# Altium PCB LinReg5_3V3.PcbDoc
Units mil, origin at the board's own origin, x right, y up, seen from the top; angles counter-clockwise.
Board outline 1545 x 1480 mil, 2 copper layers (Top Layer, Bottom Layer); 16 components, 6 nets, 36 pads, 97 vias.
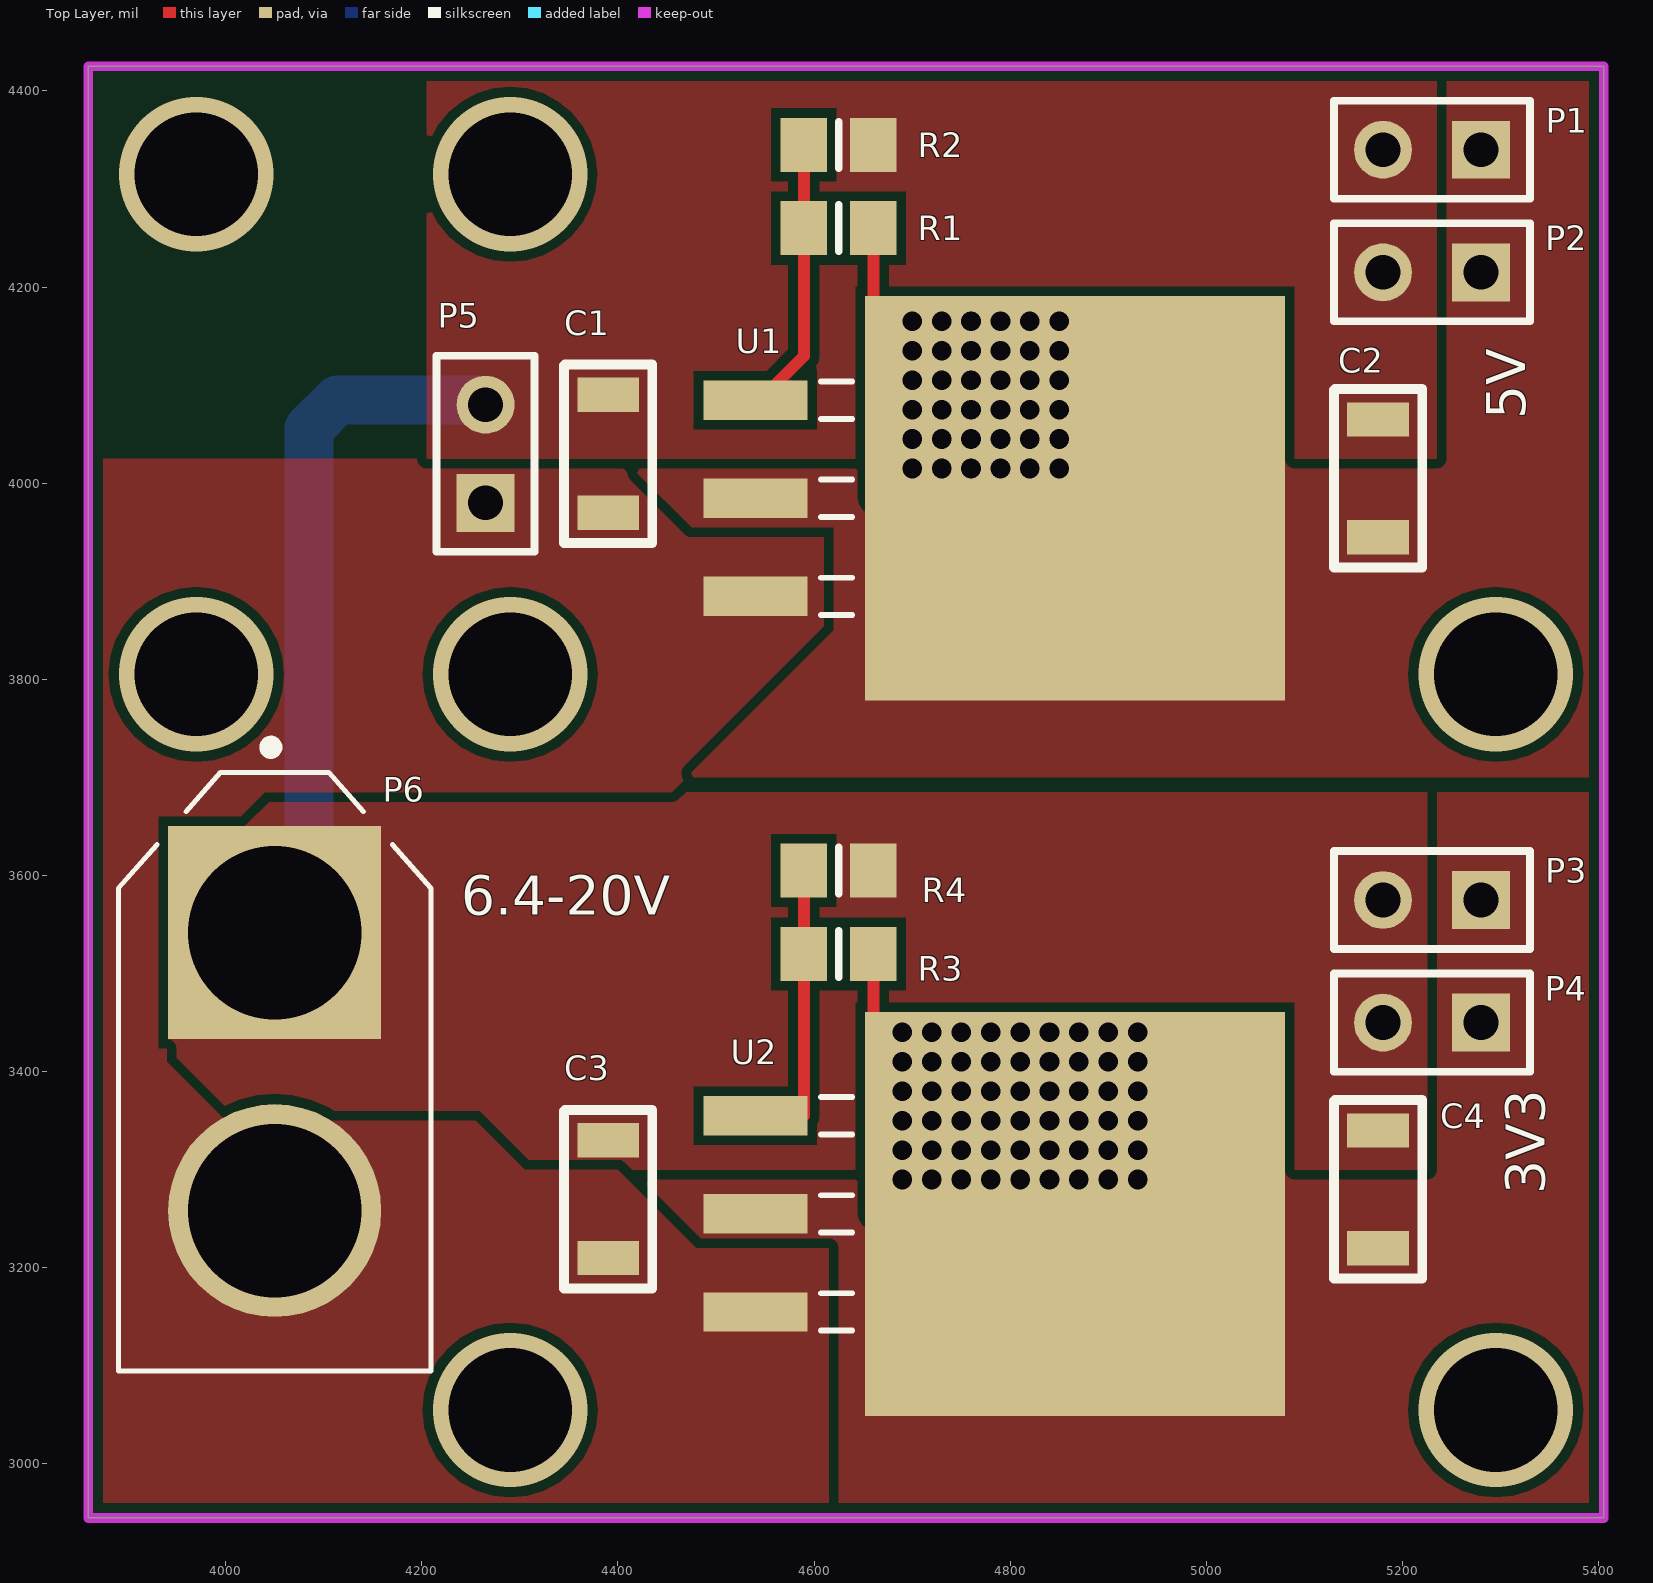
[diagram p0: Top Layer view]
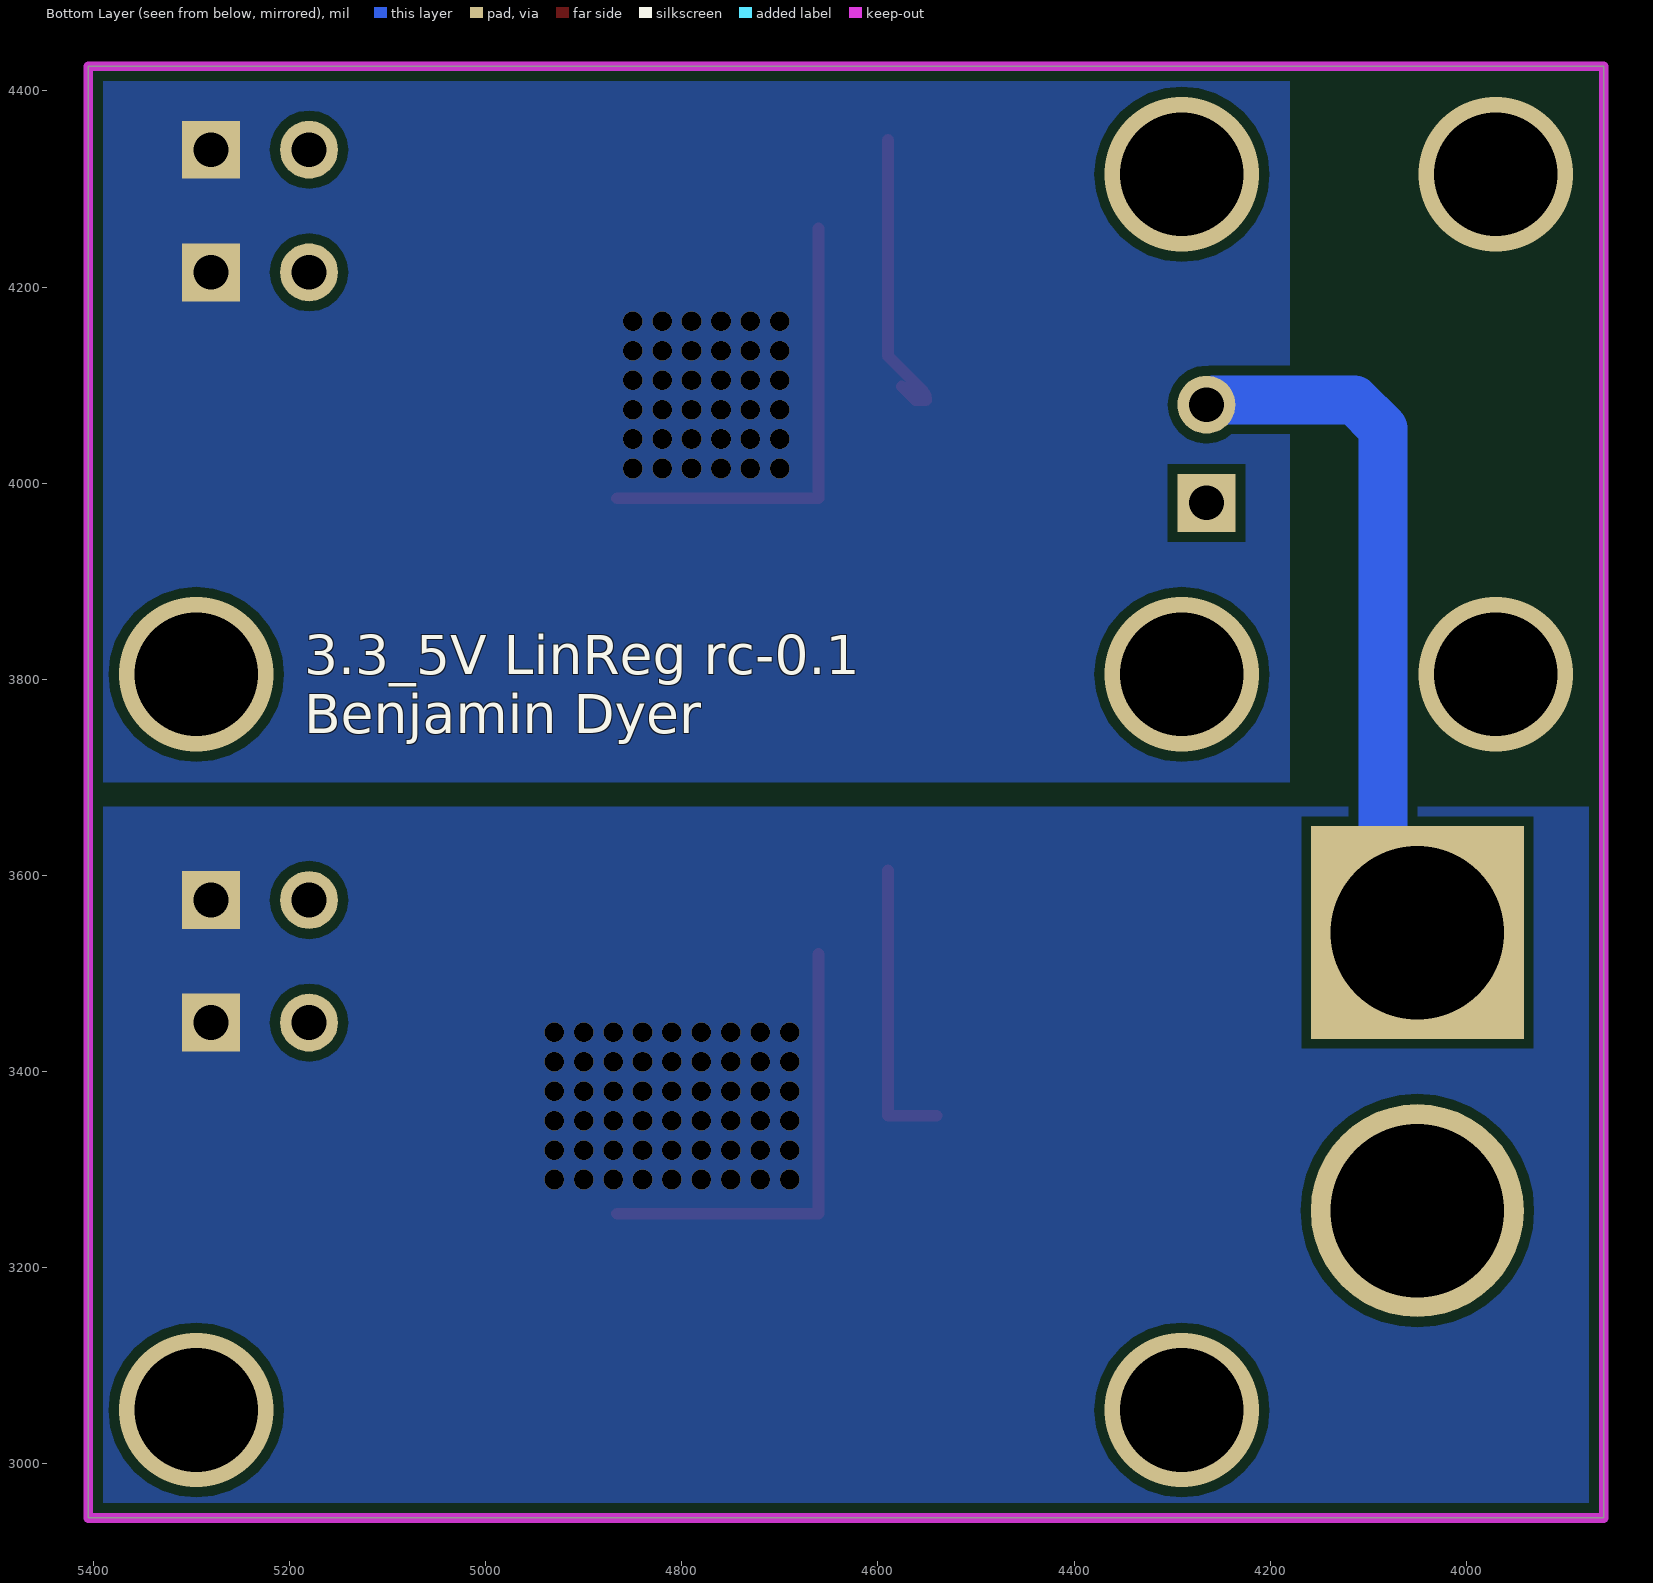
[diagram p1: Bottom Layer view, seen from below]

## Layer stack, top to bottom
Top Solder: solder mask 0.4, Solder Resist, Dk 3.5
Top Layer: signal copper 1.4
Dielectric 1: dielectric 12.6, FR-4, Dk 4.8
Bottom Layer: signal copper 1.4
Bottom Solder: solder mask 0.4, Solder Resist, Dk 3.5

## Board outline
3860,2945 5405,2945 5405,4425 3860,4425

## Design rules (kind name [scope] priority, off if disabled: settings)
Clearance [All] p1: gap=10 ignorepadtopadclearanceinfootprint=FALSE except(0: Arc-Hole Track-Hole SMDPad-Hole THPad-Hole Via-Hole Fill-Hole Poly-Hole Region-Hole Text-Hole)
PolygonConnect [All] p1: connectstyle=Direct reliefconductorwidth=10 reliefentries=4 polygonreliefangle="90 Angle" airgapwidth=10
RoutingVias [All] p1: holewidth=28 width=50 viastyle="Through Hole" minholewidth=28 minwidth=50 maxholewidth=28 maxwidth=50
SolderMaskExpansion [All] p1: expansion=4
Width [All] p1: maxlimit=150 minlimit=10 preferedwidth=12 minimp=50.000000 maximp=50.000000 favimp=50.000000
30 further rules are at their usual default settings.

## Components (designator, comment, footprint, x,y, rotation, side; value= is the part's Value field where it differs from the comment)
C1 "10uF" 1206 4390,4030 r270 top
C2 "10uF" 1206 5175,4005 r270 top
C3 "10uF" 1206 4390,3270 r270 top
C4 "10uF" 1206 5175,3280 r270 top
P1 "Header 2" HDR1X2 5280,4340 r180 top
P2 "Header 2" HDR1X2 5280,4215 r180 top
P3 "Header 2" HDR1X2 5280,3575 r180 top
P4 "Header 2" HDR1X2 5280,3450 r180 top
P5 "Header 2" HDR1X2 4265,3980 r90 top
P6 "XT60-M" *AMASS_XT60-M 4050,3400 r270 top
R1 "Res1" 6-0805_N 4625,4260 r0 top value=121
R2 "Res1" 6-0805_N 4625,4345 r180 top value=365
R3 "Res1" 6-0805_N 4625,3520 r0 top value=604
R4 "Res1" 6-0805_N 4625,3605 r180 top value=1K
U1 "LM1085IS-ADJ" TS3B 4866,3984.62 r270 top value=Value
U2 "LM1085IS-ADJ" TS3B 4866,3255 r270 top value=Value

## Footprints (in the part's own frame and the unit in brackets; to place one, negate y for a bottom-side part, rotate by r counter-clockwise, add the part's x,y. Pads: shape width x height; smd on the part's side, far side on the other; paste and mask are expansions set on the pad)
6-0805_N [mm] "Chip Resistor, Body 2.0x1.2mm, IPC Medium Density"
  rect 1.2x1.4 smd: 1(-0.9,0) 2(0.9,0)
  silkscreen extent 0,-0.6 0,0.6, body extent -1.07,-0.7 1.07,0.7, height 0.7
1206 [mil]
  rect 35x63 smd: 1(-60,0) 2(60,0)
  silkscreen extent -91,-45 91,45
*AMASS_XT60-M [mm]
  rect 5.516x5.516 hole 4.5: 1(-3.6,0)
  round 5.516 hole 4.5: 2(3.6,0)
  silkscreen extent -8.55,-4.05 7.75,4.05
HDR1X2 [mm] "Connector; Header; 2 Position"
  rect 1.5x1.5 hole 0.9: 1(0,0)
  round 1.5 hole 0.9: 2(2.54,0)
  silkscreen extent -1.27,-1.27 3.81,1.27
TS3B [mil]
  rect 40x106 smd: 1(-100,-326) 2(0,-326) 3(100,-326)
  rect 412x428 smd: 2(0,0)
  silkscreen extent -119,-259 119,-227, body extent 0,0 10,10, height 10

## Part data
C1 C2 C3 C4: library part Cap, "Capacitor", LatestRevisionDate=17-Jul-2002, LatestRevisionNote="Re-released for DXP Platform.", PackageDescription="Radial Cap, Thru-Hole; 2 Leads; 0.3 in Pin Spacing", PackageReference=RAD-0.3, Published=8-Jun-2000, Publisher="Altium Limited"
P1 P2 P3 P4 P5: "Header, 2-Pin", LatestRevisionDate=17-Jul-2002, LatestRevisionNote="Re-released for DXP Platform.", Publisher="Altium Limited"
P6: "Plug; DC supply; XT60; male; PIN: 2; for cable; soldered; 30A; 500V", Package="Package Analog Devices", Availability=Unavailable, MF=AMASS, MP=XT60-M, Price=None, SnapEDA_Link=https://www.snapeda.com/parts/XT60-M/AMASS/view-part/2883912/?ref=snap
R1 R2 R3 R4: "Resistor", LatestRevisionDate=17-Jul-2002, LatestRevisionNote="Re-released for DXP Platform.", PackageDescription="Axial Device, Thru-Hole; 2 Leads; 0.3 in Pin Spacing", PackageReference=AXIAL-0.3, Published=8-Jun-2000, Publisher="Altium Limited"
U1 U2: library part LM1085IS-ADJ/NOP, "No Description Available", Manufacturer_Part_Number=LM1085IS-ADJ/NOPB, Built_By=EMA_UL_Team, Copyright="Copyright (C) 2018 Accelerated Designs. All rights reserved", RefDes=RefDes, Type=DEV, Vendor="Texas Instruments"

## Via types
v1: diameter 20, hole 20, Top Layer to Bottom Layer, 90 vias
v2: diameter 157.48, hole 125.98, Top Layer to Bottom Layer, 7 vias

## Nets (pads, with @x,y where several pads share a name; then routed paths per layer and width w, separated by ;. In a path a pad name is that pad's centre, name@x,y a point inside that pad or via, vN(x,y) a via of type N, cw(c..) or ccw(c..) an arc to the next point about the centre after c; other vN are vias at no path point)
3V3: C4.2 P3.1 P4.1 R3.2 U2.2 | length 470.6
  Top Layer w12: R3.2 4660.43,3255 U2.2@4866,3255
  other v1: 4690,3290 4720,3290 4750,3290 4780,3290 4810,3290 4840,3290 4870,3290 4900,3290 4930,3290 4690,3320 4720,3320 4750,3320 4780,3320 4810,3320 4840,3320 4870,3320 4900,3320 4930,3320 4690,3350 4720,3350 4750,3350 4780,3350 4810,3350 4840,3350 4870,3350 4900,3350 4930,3350 4690,3380 4720,3380 4750,3380 4780,3380 4810,3380 4840,3380 4870,3380 4900,3380 4930,3380 4690,3410 4720,3410 4750,3410 4780,3410 4810,3410 4840,3410 4870,3410 4900,3410 4930,3410 4690,3440 4720,3440 4750,3440 4780,3440 4810,3440 4840,3440 4870,3440 4900,3440 4930,3440
5V: C2.2 P1.1 P2.1 R1.2 U1.2 | length 480.9
  Top Layer w12: R1.2 4660.43,3984.62 U1.2@4866,3984.62
  other v1: 4700,4015 4730,4015 4760,4015 4790,4015 4820,4015 4850,4015 4700,4045 4730,4045 4760,4045 4790,4045 4820,4045 4850,4045 4700,4075 4730,4075 4760,4075 4790,4075 4820,4075 4850,4075 4700,4105 4730,4105 4760,4105 4790,4105 4820,4105 4850,4105 4700,4135 4730,4135 4760,4135 4790,4135 4820,4135 4850,4135 4700,4165 4730,4165 4760,4165 4790,4165 4820,4165 4850,4165
12V: C1.2 C3.2 P5.1 P6.2 U1.3 U2.3
GND: C1.1 C2.1 C3.1 C4.1 P1.2 P2.2 P3.2 P4.2 P5.2 P6.1 R2.1 R4.1 | length 751.5
  Bottom Layer w50: P6.1@4065,3506.73 4085,3526.73 4085,4055.71 4114.29,4085 4257.55,4085 4262.55,4080 P5.2
NetR1_1: R1.1 R2.2 U1.1 | length 311.4
  Top Layer w12: U1.1@4575.59,4098.62 4561.59,4084.62 4550.8,4084.62 cw(c4565.7,4084.62) 4555.16,4095.16 4589.57,4129.57 R1.1 R2.2@4589.57,4350
NetR3_1: R3.1 R4.2 U2.1 | length 299.6
  Top Layer w12: U2.1 4589.57,3355 R3.1 R4.2
copper on no net:
  other v2: 4290,3055 5295,3055 3970,3805 4290,3805 5295,3805 3970,4315 4290,4315

## Polygon pours and split planes (outlines as drawn)
5V on Bottom Layer "Bottom Layer-5V" (solid, pour order 1): 4180,3695 4180,4425 5405,4425 5405,3695
3V3 on Bottom Layer "Bottom Layer-3V3" (solid, pour order 0): 3860,2945 5405,2945 5405,3670 3860,3670
3V3 on Top Layer "Top Layer-3V3" (solid, pour order 7): 4615,2945 4615,3220 4480,3220 4400,3300 5225,3300 5225,3685 5405,3685 5405,2945
GND on Top Layer "Top Layer-GND" (solid, pour order 6): 3940,3410 3940,3585 4040,3685 5225,3685 5225,3300 4305,3300 4255,3350 4000,3350
12V on Top Layer "Top Layer-12V" (solid, pour order 5): 3940,3410 3940,3585 4040,3685 4455,3685 4470,3700 4620,3850 4620,3955 4475,3955 4405,4025 3860,4025 3860,2945 4615,2945 4615,3220 4480,3220 4400,3300 4305,3300 4255,3350 4000,3350
5V on Top Layer "Top Layer-5V" (solid, pour order 4): 4470,3700 5405,3700 5405,4425 5235,4425 5235,4025 4405,4025 4475,3955 4620,3955 4620,3850
GND on Top Layer "Top Layer-GND 1" (solid, pour order 2): 4205,4025 5235,4025 5235,4425 4205,4425

## Keep-outs
Keep-Out Layer:
  lines w10: 3860,2945 3860,4425 5405,4425 5405,2945 4290,2945 3860,2945

## Silkscreen, mask and mechanical layers (free items; w line width, h text height)
Top Overlay:
  text "5V" at 5325,4065 h40 r90
  text "6.4-20V" at 4240,3560 h40
  text "3V3" at 5345,3275 h40 r90
Bottom Overlay:
  text "3.3_5V LinReg rc-0.1 / Benjamin Dyer" at 5185,3745 h40
PolygonDraw:
  lines w5: 4205,4025 4205,4035 4205,4425 5235,4425 ; 4400,3300 4615,3300 5225,3300 5225,3685 ; 4400,3300 4480,3220 4615,3220 4615,3115 4615,2945 ; 4400,3300 4305,3300 4255,3350 4000,3350 3940,3410 3940,3585 4040,3685 4055,3685 4455,3685 ; 4405,4025 5235,4025 5235,4425 ; 4405,4025 4475,3955 4620,3955 4620,3850 4470,3700 ; 4405,4025 4215,4025 3860,4025 3860,2945 4615,2945 ; 4455,3685 4470,3700 ; 4455,3685 5225,3685 ; 4470,3700 4485,3700 5405,3700 5405,4025 5405,4425 5235,4425 ; 4615,2945 5405,2945 5405,3685 5225,3685

## Text inside footprints (layer, text, board x,y; h text height)
U1: Mechanical 13 "*" at 4651,4097.12 h50 r270
U2: Mechanical 13 "*" at 4651,3367.5 h50 r270